# EAGLE board Motherboard (EAGLE 9.4.2)
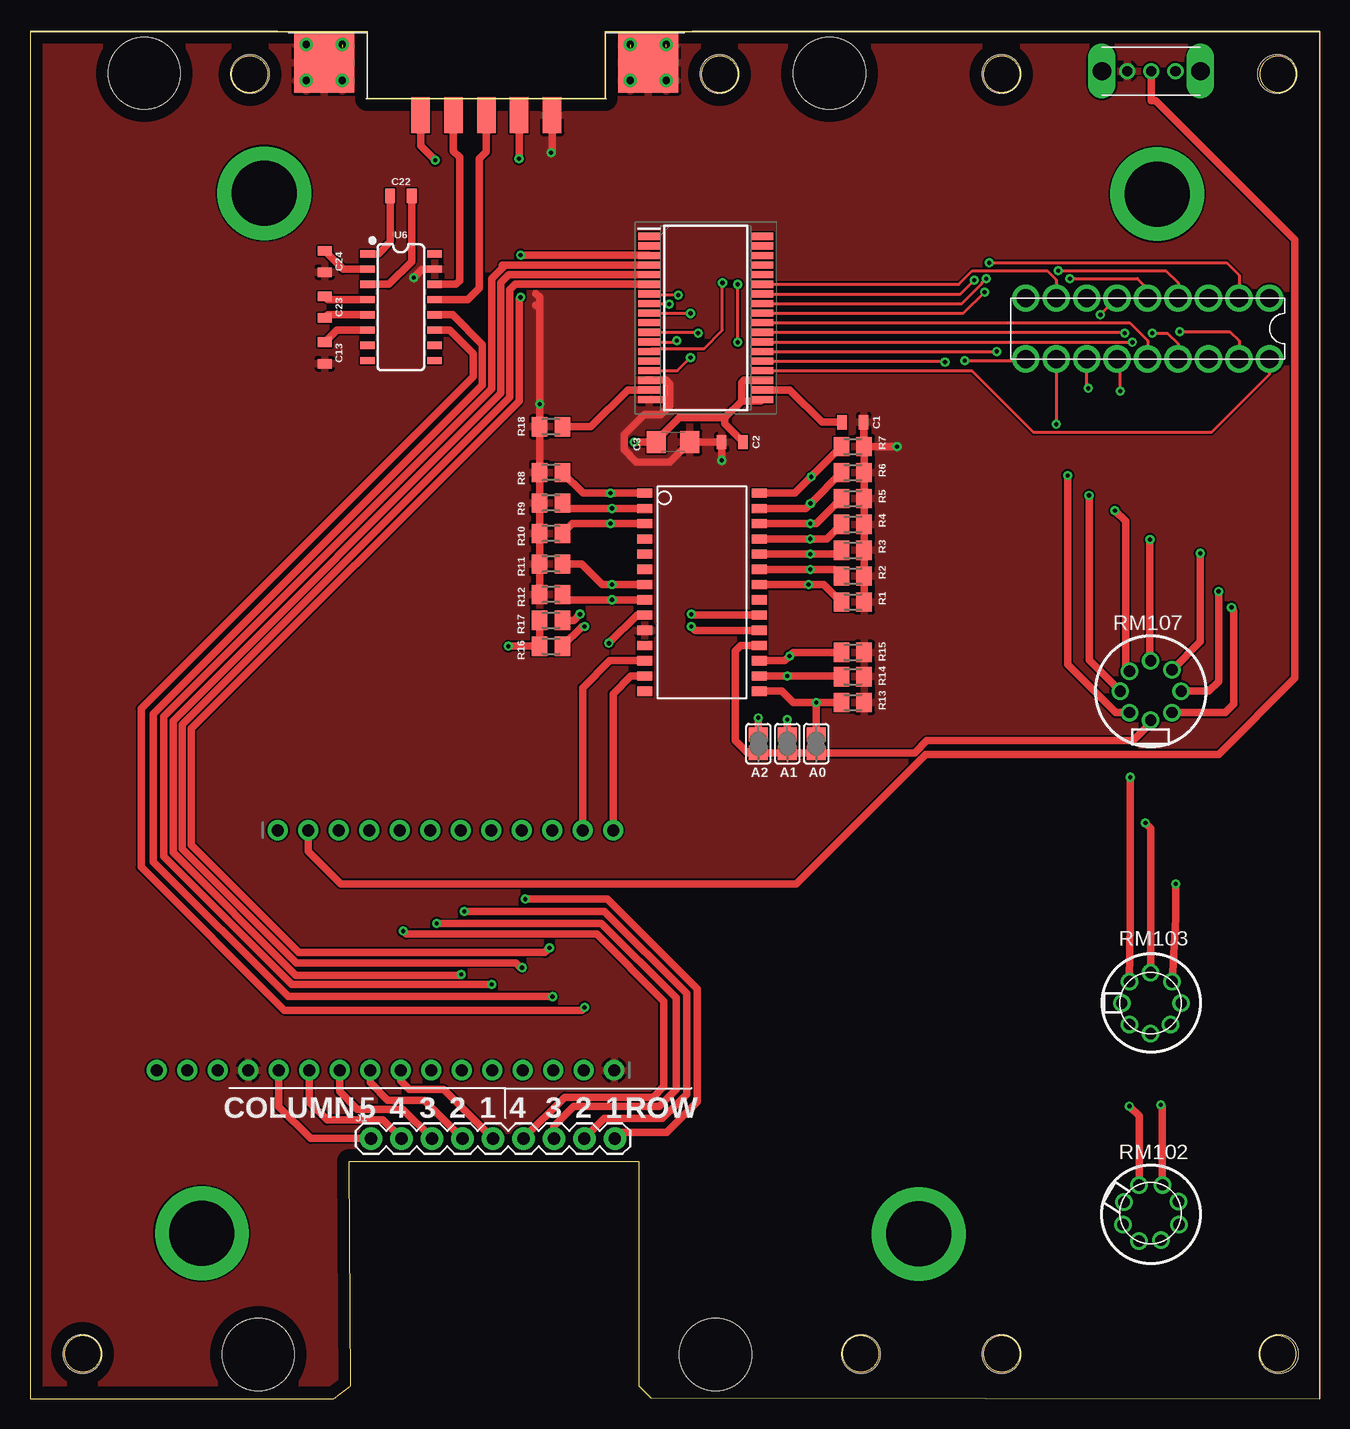
[diagram p0: board, top side]
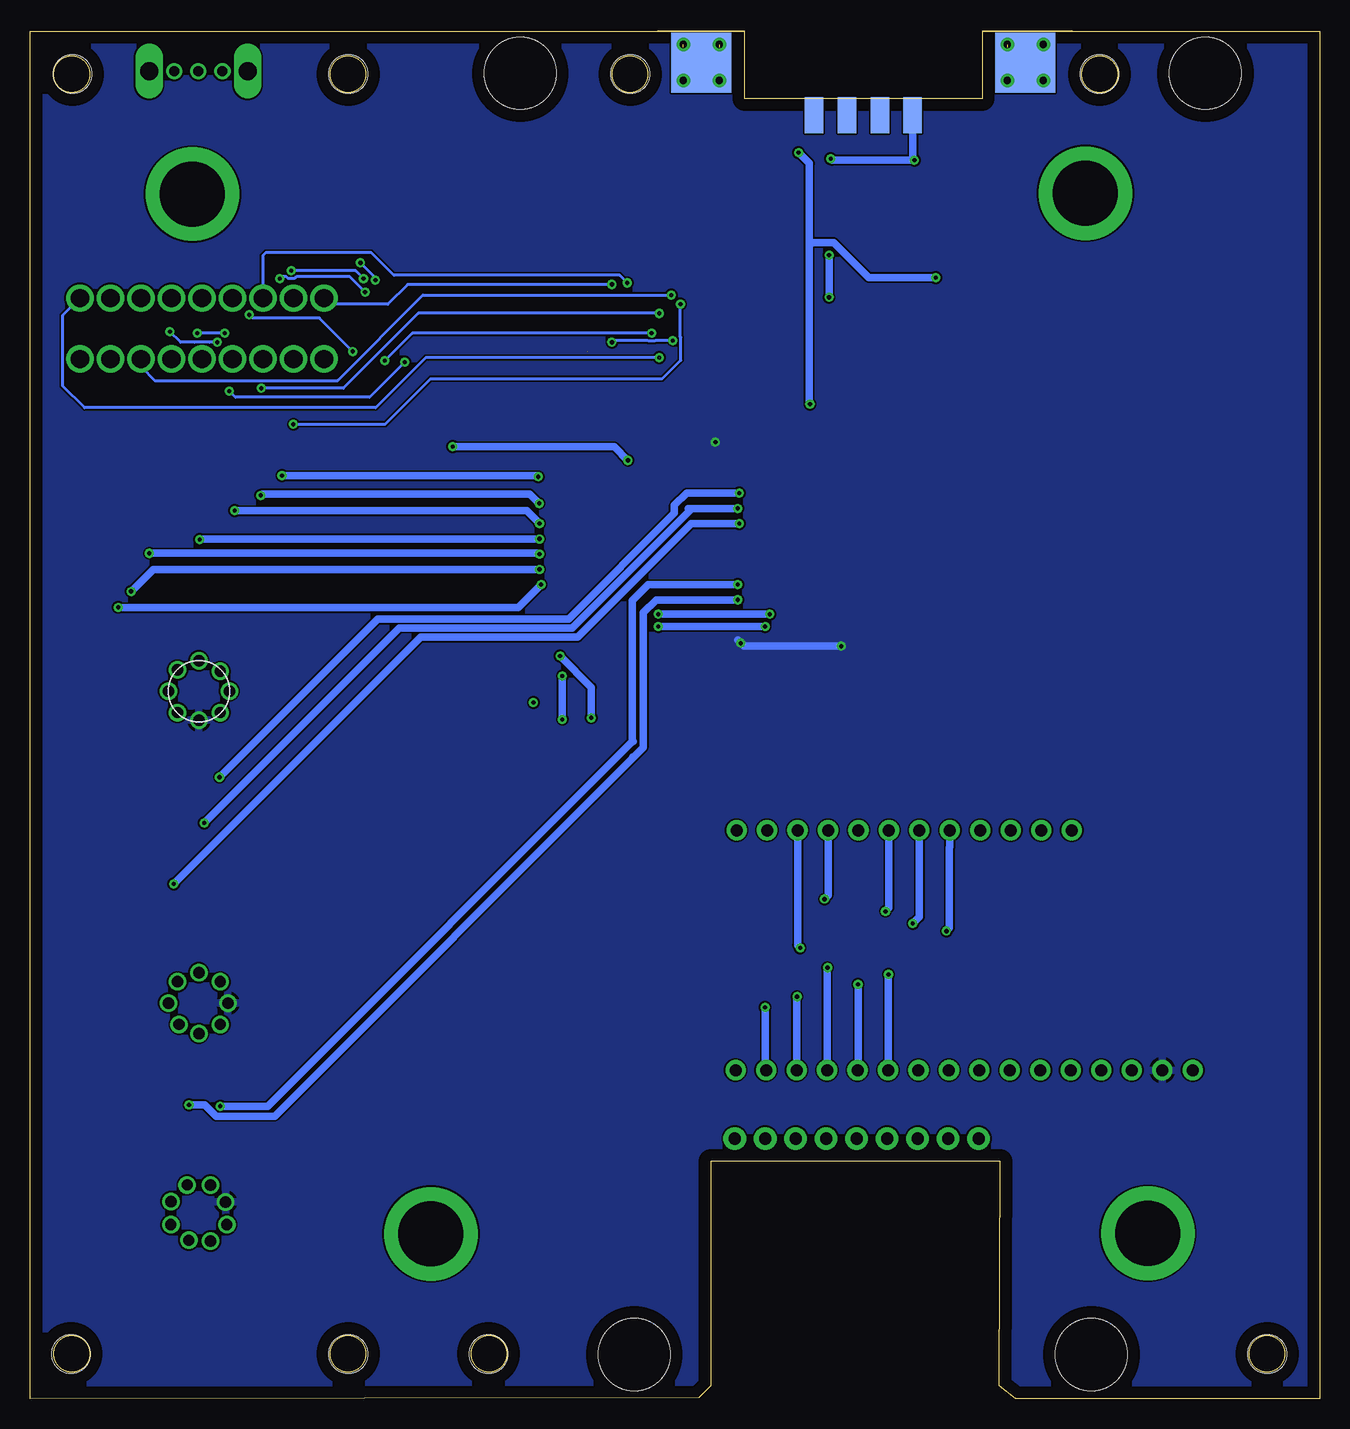
[diagram p1: board, bottom side, seen from below]

Size 107.47 x 114 mm. Coordinates in mm from the lower left corner, seen from the top.
Outline: 0,0 4.21,0 25.31,0 26.72,1.11 26.62,19.81 50.62,19.81 50.72,19.81 50.72,1.11 51.72,0.11 107.47,0 107.47,114 55.17,114 47.93,114 47.93,108.41 28.12,108.41 28.12,114 20.62,114 0,114 0,0
Outline: circle at 4.39,3.76 radius 1.5
Outline: circle at 69.22,3.76 radius 1.5
Outline: circle at 80.97,110.44 radius 1.5
Outline: circle at 104,110.44 radius 1.5
Outline: circle at 80.97,3.76 radius 1.5
Outline: circle at 104,3.76 radius 1.5
Outline: circle at 18.32,110.44 radius 1.5
Outline: circle at 57.47,110.44 radius 1.5
Copper layers (1*16): Top 0.035mm / dielectric 1.5mm / Bottom 0.035mm
Design rules "default": minimum track width 6mil, minimum drill 0.35mm, track to track 6mil, track to pad 6mil, pad to pad 6mil, via to via 6mil, smd to smd 6mil, copper to edge 40mil, drill to drill 6mil, minimum pad ring 10mil, minimum via ring 8mil, stop-mask expansion 4mil, vias tented up to drill 0mil, thermal gap 10mil
Holes 3.2 mm at 18.34,110.44 57.45,110.44 80.95,110.44 103.94,110.44 104.06,3.76 80.95,3.76 69.26,3.76 4.37,3.76
Holes 6 mm at 9.52,110.51 66.62,110.51 19.02,3.71 57.12,3.71
Milling: 8 lines

## Footprints (pad centres in the part's own frame; a part is rotated, then mirrored left to right if it is on the bottom)
SJ = smd 1.168 x 1.6: 1 -0.762,0; 2 0.762,0
0805 = smd 0.8 x 1.2: 1 -0.9,0; 2 0.9,0
C1206 = smd 1.6 x 1.8: 1 -1.4,0; 2 1.4,0
DE09S065TLF = drill 0.6: G1 -15,4.5; G2 -12,4.5; G3 -15,1.5; G4 -12,1.5; G5 12,4.5; G6 15,4.5; G7 12,1.5; G8 15,1.5 | smd 5 x 5 bottom: G9 13.5,3; G10 -13.5,3 | smd 5 x 5: G11 -13.5,3; G12 13.5,3 | smd 1.54 x 3: P1 5.48,-1.37; P2 2.74,-1.37; P3 0,-1.37; P4 -2.74,-1.37; P5 -5.48,-1.37 | smd 1.54 x 3 bottom: P6 4.11,-1.37; P7 1.37,-1.37; P8 -1.37,-1.37; P9 -4.11,-1.37
SOP80P1030X264-36N = smd 1.8 x 0.6: 1 -4.725,6.8; 2 -4.725,6; 3 -4.725,5.2; 4 -4.725,4.4; 5 -4.725,3.6; 6 -4.725,2.8; 7 -4.725,2; 8 -4.725,1.2; 9 -4.725,0.4; 10 -4.725,-0.4; 11 -4.725,-1.2; 12 -4.725,-2; 13 -4.725,-2.8; 14 -4.725,-3.6; 15 -4.725,-4.4; 16 -4.725,-5.2; 17 -4.725,-6; 18 -4.725,-6.8; 19 4.725,-6.8; 20 4.725,-6; 21 4.725,-5.2; 22 4.725,-4.4; 23 4.725,-3.6; 24 4.725,-2.8; 25 4.725,-2; 26 4.725,-1.2; 27 4.725,-0.4; 28 4.725,0.4; 29 4.725,1.2; 30 4.725,2; 31 4.725,2.8; 32 4.725,3.6; 33 4.725,4.4; 34 4.725,5.2; 35 4.725,6; 36 4.725,6.8
SO28W = smd 0.762 x 1.27: 1 -7.62,-4.78; 2 -6.35,-4.78; 3 -5.08,-4.78; 4 -3.81,-4.78; 5 -2.54,-4.78; 6 -1.27,-4.78; 7 0,-4.78; 8 1.27,-4.78; 9 2.54,-4.78; 10 3.81,-4.78; 11 5.08,-4.78; 12 6.35,-4.78; 13 7.62,-4.78; 14 8.89,-4.78; 15 8.89,4.78; 16 7.62,4.78; 17 6.35,4.78; 18 5.08,4.78; 19 3.81,4.78; 20 2.54,4.78; 21 1.27,4.78; 22 0,4.78; 23 -1.27,4.78; 24 -2.54,4.78; 25 -3.81,4.78; 26 -5.08,4.78; 27 -6.35,4.78; 28 -7.62,4.78
1X09 = drill 1.016 pad 1.88: 1 0,0; 2 2.54,0; 3 5.08,0; 4 7.62,0; 5 10.16,0; 6 12.7,0; 7 15.24,0; 8 17.78,0; 9 20.32,0
1X16_ROUND = drill 1 pad 1.676: 1 -19.05,0; 2 -16.51,0; 3 -13.97,0; 4 -11.43,0; 5 -8.89,0; 6 -6.35,0; 7 -3.81,0; 8 -1.27,0; 9 1.27,0; 10 3.81,0; 11 6.35,0; 12 8.89,0; 13 11.43,0; 14 13.97,0; 15 16.51,0; 16 19.05,0
1X12_ROUND = drill 1 pad 1.676: 1 -13.97,0; 2 -11.43,0; 3 -8.89,0; 4 -6.35,0; 5 -3.81,0; 6 -1.27,0; 7 1.27,0; 8 3.81,0; 9 6.35,0; 10 8.89,0; 11 11.43,0; 12 13.97,0
M0805 = smd 1.3 x 1.6: 1 -0.95,0; 2 0.95,0
SO16 = smd 0.6 x 1.2: 1 -4.445,-2.8; 2 -3.175,-2.8; 3 -1.905,-2.8; 4 -0.635,-2.8; 5 0.635,-2.8; 6 1.905,-2.8; 7 3.175,-2.8; 8 4.445,-2.8; 9 4.445,2.8; 10 3.175,2.8; 11 1.905,2.8; 12 0.635,2.8; 13 -0.635,2.8; 14 -1.905,2.8; 15 -3.175,2.8; 16 -4.445,2.8
DIP-18 = drill 1.524: 1 7.62,2.54; 2 5.08,2.54; 3 2.54,2.54; 4 0,2.54; 5 -2.54,2.54; 6 -5.08,2.54; 7 -7.62,2.54; 8 -10.16,2.54; 9 -12.7,2.54; 10 -12.7,-2.54; 11 -10.16,-2.54; 12 -7.62,-2.54; 13 -5.08,-2.54; 14 -2.54,-2.54; 15 0,-2.54; 16 2.54,-2.54; 17 5.08,-2.54; 18 7.62,-2.54
RM107772BCB = drill 0.95: 1 1.778,1.778; 2 2.54,0; 3 1.778,-1.778; 4 0,-2.54; 5 -1.778,-1.651; 6 -2.54,0; 7 -1.778,1.778; C 0,2.413
OS102011MA1QN1 = drill 1.524 pad 2 long: CASE1 0,0; CASE2 8.204,0 | drill 0.85 pad 1.27: P$1 2.108,0; P$2 4.115,0; P$3 6.121,0
KEYSTONESTANDOFF = drill 5.41 pad 7.8: P$1 0,0

## Placement (x,y rotation side)
A0  [SJ]  65.52,54.62 270 top
A1  [SJ]  63.1,54.62 270 top
A2  [SJ]  60.69,54.62 270 top
C1  22pf  [0805]  68.57,81.42 0 top
C2  100nF  [0805]  58.53,79.77 0 top
C3  47uF  [C1206]  53.58,79.77 180 top
C13  1.0uF  [0805]  24.56,87.2 270 top
C22  0.1uF  [0805]  30.91,100.28 0 top
C23  0.1uF  [0805]  24.56,91.01 270 top
C24  0.1uF  [0805]  24.56,94.82 270 top
DE9FEMALE  EDGEMOUNTDE9  [DE09S065TLF]  38.02,108.41 0 top
IC1  MAX6954AAX+  [SOP80P1030X264-36N]  56.31,90.12 0 top
IC2  MCP23017SO  [SO28W]  56,67.89 270 top
J1  [1X09]  28.42,21.71 0 top
JP1  [1X16_ROUND]  29.62,27.41 180 top
JP3  [1X12_ROUND]  34.62,47.41 0 top
R1  10k  [M0805]  68.57,66.44 180 top
R2  10k  [M0805]  68.57,68.59 180 top
R3  10k  [M0805]  68.57,70.75 180 top
R4  10k  [M0805]  68.57,72.91 180 top
R5  10k  [M0805]  68.57,75.07 180 top
R6  10k  [M0805]  68.57,77.23 180 top
R7  10k  [M0805]  68.57,79.39 180 top
R8  10k  [M0805]  43.42,77.23 0 top
R9  10k  [M0805]  43.42,74.69 0 top
R10  10k  [M0805]  43.42,72.15 0 top
R11  10k  [M0805]  43.42,69.61 0 top
R12  10k  [M0805]  43.42,67.07 0 top
R13  10k  [M0805]  68.57,58.05 180 top
R14  10k  [M0805]  68.57,60.21 180 top
R15  10k  [M0805]  68.57,62.24 180 top
R16  10k  [M0805]  43.42,62.75 180 top
R17  10k  [M0805]  43.42,64.91 180 top
R18  56k  [M0805]  43.42,81.04 0 top
U6  MAX3232  [SO16]  30.91,91.01 270 top
U$1  HDSP-A27C  [DIP-18]  95.68,89.23 0 top
U$2  RM107772BCB  [RM107772BCB]  93.39,59 180 bottom
U$3  RM107772BCB  [RM107772BCB]  93.39,33 90 top
U$5  OS102011MA1QN1  [OS102011MA1QN1]  89.33,110.69 0 top
U$6  RM107772BCB  [RM107772BCB]  93.39,15.5 67.5 top
U$7  KEYSTONESTANDOFF  [KEYSTONESTANDOFF]  14.32,13.81 0 top
U$8  KEYSTONESTANDOFF  [KEYSTONESTANDOFF]  19.52,100.51 0 top
U$9  KEYSTONESTANDOFF  [KEYSTONESTANDOFF]  74.06,13.76 0 top
U$10  KEYSTONESTANDOFF  [KEYSTONESTANDOFF]  93.94,100.44 0 top

## Library data of the parts
A0 A1 A2 = jumper
C1 C2 = SparkFun-Capacitors; PROD_ID: CAP-11625
C3 IC2 = adafruit
C13 C22-C24 = SparkFun-Capacitors; PROD_ID: CAP-08064
DE9FEMALE = Serial
IC1 = SamacSys_Parts; DESCRIPTION: MAX6954AAX+, LED Display Driver, 16-Digits 128-Segments, 2.7 5.5 V, 36-Pin SSOP; HEIGHT: 2.64mm; MANUFACTURER_NAME: Maxim Integrated; MANUFACTURER_PART_NUMBER: MAX6954AAX+; MOUSER_PART_NUMBER: 700-MAX6954AAX; MOUSER_PRICE-STOCK: https://www.mouser.com/Search/Refine.aspx?Keyword=700-MAX6954AAX
J1 = SparkFun-Connectors
JP1 JP3 = microbuilder
R1-R18 = resistor
U6 = SparkFun-IC-Comms; PROD_ID: IC-08171
U$1-U$3 U$6-U$10 = Segment displays
U$5 = FPC

## Nets
3V3: U6.16
!RESET: JP1.16
+3V3: A0.2 A1.2 A2.2 C2.2 C3.2 IC1.19 IC1.21 IC2.9 IC2.18 JP1.15 R16.2 R17.2 U$2.C U$3.C U$6.C
/CS: IC1.3 JP3.10
A5: JP1.7
AREF: JP1.14
D9: JP3.8
D13: JP3.4
EN: JP3.2 U$5.P$2
GND: C1.2 C2.1 C3.1 C13.2 C24.2 DE9FEMALE.G1 DE9FEMALE.G2 DE9FEMALE.G3 DE9FEMALE.G4 DE9FEMALE.G5 DE9FEMALE.G6 DE9FEMALE.G7 DE9FEMALE.G8 DE9FEMALE.G9 DE9FEMALE.G10 DE9FEMALE.G11 DE9FEMALE.G12 DE9FEMALE.P1 IC1.16 IC1.18 IC2.10 JP1.1 JP1.13 R1.1 R2.1 R3.1 R4.1 R5.1 R6.1 R7.1 R8.1 R9.1 R10.1 R11.1 R12.1 R13.1 R14.1 R15.1 R18.1 U6.15 U$5.P$1
KC1: J1.5 JP1.8
KC2: J1.4 JP1.9
KC3: J1.3 JP1.10
KC4: J1.2 JP1.11
KC5: J1.1 JP1.12
KR1: J1.9 JP3.9
KR2: J1.8 JP3.7
KR3: J1.7 JP3.6
KR4: J1.6 JP3.5
MISO: IC1.6 JP1.4
MOSI: IC1.4 JP1.5
N$1: IC1.7 U$1.16
N$2: IC1.9 U$1.12
N$3: IC1.11 U$1.10
N$4: IC1.12 U$1.9
N$5: IC1.13 U$1.7
N$6: IC1.15 U$1.1
N$7: IC1.22 U$1.18
N$8: IC1.23 U$1.13
N$9: IC1.24 U$1.6
N$10: IC1.25 U$1.17
N$11: IC1.26 U$1.15
N$12: IC1.27 U$1.14
N$13: IC1.28 U$1.5
N$14: IC1.29 U$1.4
N$15: IC1.30 U$1.2
N$16: IC1.31 U$1.8
N$17: IC1.8 U$1.11
N$18: C22.2 U6.3
N$19: C22.1 U6.1
N$20: C23.1 U6.4
N$21: C23.2 U6.5
N$22: C24.1 U6.2
N$23: C13.1 U6.6
N$24: DE9FEMALE.P2 DE9FEMALE.P5 DE9FEMALE.P9
N$25: A0.1 IC2.15 R13.2
N$26: A1.1 IC2.16 R14.2
N$27: A2.1 IC2.17 R15.2
N$28: IC2.19 R16.1
N$29: IC2.20 R17.1
N$30: C1.1 IC1.20
N$31: IC1.17 R18.2
RM102-1: IC2.7 R11.2 U$6.1
RM102-2: IC2.8 R12.2 U$6.2
RM103-1: IC2.1 R8.2 U$3.1
RM103-2: IC2.2 R9.2 U$3.2
RM103-3: IC2.3 R10.2 U$3.3
RM107-1: IC2.22 R1.2 U$2.1
RM107-2: IC2.23 R2.2 U$2.2
RM107-3: IC2.24 R3.2 U$2.3
RM107-4: IC2.25 R4.2 U$2.4
RM107-5: IC2.26 R5.2 U$2.5
RM107-6: IC2.27 R6.2 U$2.6
RM107-7: IC2.28 R7.2 U$2.7
RXD: DE9FEMALE.P3 U6.13
SCK: IC1.5 JP1.6
SCL: IC2.12 JP3.11
SDA: IC2.13 JP3.12
TXD: DE9FEMALE.P4 U6.14
UART_RX: JP1.3 U6.12
UART_TX: JP1.2 U6.11
VBAT: JP3.1
VBUS: JP3.3

## Tracks (layer width: path | path; a pad name or v marks a point on that pad's centre or on a via)
+3V3  (via drill 0.35)
  Top 0.61: R17.2 R16.2 v39.86,62.75 | C3.2 52.18,79.89 54.09,81.8 57.9,81.8 | 57.9,81.8 59.29,83.2 | 59.29,83.2 59.29,84.72 59.49,84.92 IC1.21 | IC1.19 60.91,83.2 59.29,83.2 | C2.2 57.9,81.3 57.9,81.8 | U$2.C 93.39,56.34 91.93,54.88 74.73,54.88 73.71,53.86 A0.2 A1.2 A2.2 59.8,53.86 58.79,54.88 58.79,62.37 59.23,62.81 IC2.18 | IC2.9 50.59,65.35 v48.25,63.01 | C3.2 v50.35,79.77 | C3.2 50.28,79.77 C3.2
  Bottom 0.61: 48.5,63.26 v48.25,63.01 47.99,62.75 v39.86,62.75
  pour Bottom: 0.24,114.06 28.18,114.06 28.18,108.34 47.86,108.34 47.86,113.81 107.56,113.81 107.56,0.01 51.93,0.01 50.79,1.16 50.79,19.57 50.66,19.7 26.66,19.7 26.66,1.41 25.26,0.01 0.11,0.01 0.11,113.93
/CS  (via drill 0.35)
  Top 0.61: v43.29,37.61 42.91,37.22 22.4,37.22 13.45,46.17 13.45,55.89 40.75,83.2 40.75,91.71 v40.88,91.83 | v40.88,95.35 51.55,95.35 IC1.3
  Bottom 0.61: JP3.10 43.51,37.82 v43.29,37.61 | v40.88,91.83 v40.88,95.35
EN
  Top 0.61: JP3.2 23.19,45.64 25.89,42.94 63.87,42.94 74.66,53.73 99.05,53.73 105.4,60.08 105.4,96.63 93.8,108.23 93.45,108.23 U$5.P$2
GND  (via drill 0.35)  (3 unrouted)
  Top 0.61: R7.1 R6.1 R5.1 R4.1 R3.1 R2.1 R1.1 | R12.1 R11.1 R10.1 R9.1 R8.1 R18.1 | R7.1 69.47,79.44 C1.2 | 53.33,83.33 53.33,82.82 52.56,82.06 51.17,82.06 49.52,80.41 49.52,79.13 50.53,78.12 53.33,78.12 C3.1 C2.1 57.64,79.76 v57.64,78.25 | 53.33,83.33 53.33,84.6 53,84.92 IC1.16 | IC1.18 53.32,83.32 53.33,83.33 | R18.1 v42.47,82.94 | v42.47,82.94 42.47,90.88 42.15,91.2 | R18.1 v42.47,82.94 | v42.47,82.94 42.47,91.84 42.15,92.16 | U6.15 32.69,94.19 v31.99,93.49 | DE9FEMALE.P1 43.5,103.98 v43.42,103.9 | R7.1 v72.25,79.39 | DE9FEMALE.G1 24.39,111.54 | 26.02,112.67 25.79,112.67 25.14,112.02 25.14,111.52 25.03,111.41 DE9FEMALE.G10 | DE9FEMALE.G10 24.52,110.4 24.03,109.91 DE9FEMALE.G3 | DE9FEMALE.G10 24.48,111.41 24.37,111.52 24.39,111.54 | DE9FEMALE.G10 24.39,111.54 | DE9FEMALE.G10 DE9FEMALE.G4 | DE9FEMALE.G9 51.15,111.41 49.89,112.67 49.77,112.67 | DE9FEMALE.G9 52.79,112.67 53.02,112.67 | DE9FEMALE.G9 52.42,111.41 53.58,110.25 53.24,109.91 DE9FEMALE.G8 | DE9FEMALE.G9 DE9FEMALE.G7 | DE9FEMALE.G9 51.52,110.73 51.04,110.25 51.04,110.93 DE9FEMALE.G9
  Bottom 0.61: v31.99,93.49 37.58,93.49 40.5,96.41 42.28,96.41 42.53,96.15 | v42.47,82.94 42.53,83.01 42.53,96.15 | 42.53,96.15 42.53,103.01 v43.42,103.9 | v72.25,79.39 58.79,79.39 v57.64,78.25 | 23.02,112.67 23.26,112.67 DE9FEMALE.G10 | DE9FEMALE.G3 23.02,110.17 23.1,110.25 23.36,110.25 DE9FEMALE.G10 | DE9FEMALE.G4 25.98,109.91 25,110.88 24.37,110.25 24.52,110.4 DE9FEMALE.G10 | 26.02,112.67 25.79,112.67 DE9FEMALE.G10 | 51.04,112.67 50.02,112.67 | 50.02,112.67 49.77,112.67 50.02,112.67 | 50.02,112.67 51.04,112.67 | 53.02,112.67 51.04,112.67 | DE9FEMALE.G9 DE9FEMALE.G7 | DE9FEMALE.G9 DE9FEMALE.G8 | DE9FEMALE.G9 51.52,112.19 51.04,112.67 | DE9FEMALE.G9 51.29,111.41 50.02,112.67
  pour Top: 0.24,114.06 28.18,114.06 28.18,107.71 47.99,107.71 47.99,113.81 107.56,113.81 107.56,0.01 51.93,0.01 50.79,1.16 50.79,19.7 26.66,19.7 26.66,1.16 25.51,0.01 24.88,0.01 -0.01,0.01 -0.01,113.93 0.11,114.06
KC1
  Top 0.61: J1.5 34.49,25.79 31.61,25.79 30.89,26.51 JP1.8
KC2
  Top 0.61: J1.4 32.84,24.91 29.83,24.91 28.35,26.39 JP1.9
KC3
  Top 0.61: J1.3 31.07,24.14 27.29,24.14 25.81,25.63 JP1.10
KC4
  Top 0.61: J1.2 29.42,23.25 24.75,23.25 23.27,24.74 JP1.11
KC5
  Top 0.61: J1.1 23.38,21.71 20.73,24.36 JP1.12
KR1  (via drill 0.35)
  Top 0.61: J1.9 49.27,22.24 53.07,22.24 55.61,24.78 55.61,34.18 48.12,41.67 v41.26,41.67
  Bottom 0.61: JP3.9 40.97,41.96 v41.26,41.67
KR2  (via drill 0.35)
  Top 0.61: J1.8 47.87,23.38 49.01,23.38 52.69,23.38 53.83,24.52 54.72,25.41 54.72,27.45 54.72,33.8 47.86,40.65 v36.18,40.65
  Bottom 0.61: JP3.7 35.89,40.94 v36.18,40.65
KR3  (via drill 0.35)
  Top 0.61: v33.89,39.64 47.61,39.64 53.83,33.42 53.83,25.79 52.44,24.4 45.32,24.4 43.66,22.73 J1.7
  Bottom 0.61: JP3.6 33.35,40.18 v33.89,39.64
KR4  (via drill 0.35)
  Top 0.61: J1.6 44.57,25.16 51.93,25.16 52.82,26.05 52.82,33.16 47.23,38.75 31.36,38.75 v31.1,39
  Bottom 0.61: v31.1,39 30.85,39.26 30.85,45.99 30.81,46.03 JP3.5
MISO  (via drill 0.35)
  Top 0.61: v41.01,35.95 40.88,35.95 40.5,36.34 22.21,36.34 12.69,45.86 12.69,56.21 39.99,83.52 39.99,92.47 40.44,92.92 IC1.6
  Bottom 0.61: JP1.4 41.05,35.91 v41.01,35.95
MOSI  (via drill 0.35)
  Top 0.61: IC1.4 39.61,94.52 | 39.61,94.52 39.37,94.52 | 39.61,94.52 38.47,93.38 38.47,84.22 11.16,56.91 11.16,45.23 21.83,34.56 v38.47,34.56
  Bottom 0.61: v38.47,34.56 38.47,27.45 JP1.5
N$1  (via drill 0.35)  (1 unrouted)
  Top 0.254: v54.02,92.02 51.68,92.02 IC1.7
  Bottom 0.254: U$1.16 98.22,86.06 97.08,84.91 81.84,84.91 74.73,92.02 v54.02,92.02
N$2  (via drill 0.35)  (1 unrouted)
  Top 0.254: IC1.9 55.02,90.52 v55.04,90.5 | v88.19,84.25 88.06,84.38 U$1.12
  Bottom 0.254: v55.04,90.5 75.11,90.5 81.35,84.25 v88.19,84.25
N$3  (via drill 0.35)
  Top 0.254: IC1.11 55.6,88.92 v55.67,88.85 | v77.9,86.56 82.85,86.56 U$1.10
  Bottom 0.254: v55.67,88.85 75.61,88.85 v77.9,86.56
N$4  (via drill 0.35)
  Top 0.254: IC1.12 53.78,88.12 v53.9,88.24 | v58.98,88.09 v58.98,92.91
  Bottom 0.254: v58.98,88.09 58.83,88.24 55.99,88.24 55.95,88.19 55.4,88.19 55.36,88.24 v53.9,88.24 | v58.98,92.91 76,92.91 77.65,91.26 82.47,91.26 U$1.9
N$5  (via drill 0.35)
  Top 0.254: IC1.13 51.81,87.54 52.6,87.54 52.64,87.58 56.18,87.58 57.71,89.1 v57.71,93.04
  Bottom 0.254: v57.71,93.04 58.34,93.68 77.14,93.68 79.04,95.58 87.81,95.58 88.06,95.33 U$1.7
N$6  (via drill 0.35)  (1 unrouted)
  Top 0.254: IC1.15 53.94,85.72 v55.04,86.82
  Bottom 0.254: v55.04,86.82 74.47,86.82 78.66,82.63 102.92,82.63 104.72,84.43 104.72,90.35 U$1.1
N$7
  Top 0.254: IC1.22 78.49,85.72 83.62,80.59 98.47,80.59 103.3,85.42 U$1.18
N$8  (via drill 0.35)
  Top 0.254: IC1.23 76.17,86.52 v76.25,86.44 | v90.85,84.02 90.85,86.44 U$1.13
  Bottom 0.254: v76.25,86.44 79.17,83.52 90.35,83.52 v90.85,84.02
N$9  (via drill 0.35)  (1 unrouted)
  Top 0.254: IC1.24 v80.56,87.32 v80.57,87.33 | v89.2,90.38 v89.21,90.38 U$1.6
  Bottom 0.254: v80.57,87.33 83.36,90.12 88.95,90.12 v89.2,90.38
N$10  (via drill 0.35)
  Top 0.254: IC1.25 91.84,88.12 v91.87,88.09 | v95.81,88.98 100,88.98 100.76,88.22 U$1.17
  Bottom 0.254: v95.81,88.98 94.92,88.09 93.76,88.09 93.73,88.11 92.55,88.11 92.53,88.09 v91.87,88.09
N$11  (via drill 0.35)
  Top 0.254: IC1.26 91.17,88.92 v91.23,88.85 | v93.52,88.85 94.79,88.85 95.68,87.96 U$1.15
  Bottom 0.254: v91.23,88.85 v93.52,88.85
N$12
  Top 0.254: IC1.27 91.64,89.72 93.14,88.22 U$1.14
N$13  (via drill 0.35)
  Top 0.254: IC1.28 77.79,90.52 v79.55,92.28 | v86.66,93.4 92.27,93.4 93.14,92.53 U$1.5
  Bottom 0.254: v79.55,92.28 80.82,93.55 85.27,93.55 85.42,93.4 85.96,93.4 86.11,93.55 86.51,93.55 v86.66,93.4
N$14  (via drill 0.35)
  Top 0.254: v79.68,93.4 79.34,93.06 79.34,93 77.66,91.32 IC1.29 | v85.69,94.06 94.66,94.06 95.68,93.04 U$1.4
  Bottom 0.254: v79.68,93.4 80.34,94.06 v85.69,94.06
N$15  (via drill 0.35)
  Top 0.254: IC1.30 77.53,92.12 v78.68,93.27 | v79.93,94.72 99.72,94.72 100.76,93.68 U$1.2
  Bottom 0.254: v78.68,93.27 78.68,93.47 v79.93,94.72
N$16
  Top 0.254: IC1.31 77.4,92.92 78.54,94.06 84.76,94.06 85.52,93.3 U$1.8
N$17  (via drill 0.35)
  Top 0.254: U$1.11 v85.52,81.25 | v85.52,81.25 85.52,81.23 v85.52,81.25 | v53.26,91.26 51.64,91.26 IC1.8
  Bottom 0.254: v85.52,81.25 77.88,81.25 74.09,85.04 54.79,85.04 53.24,86.59 53.24,88.51 53.26,88.53 v53.26,91.26
N$18
  Top 0.61: C22.2 31.81,94.83 29.89,92.91 U6.3
N$19
  Top 0.61: C22.1 30.01,96.46 29.01,95.45 U6.1
N$20
  Top 0.61: U6.4 24.82,91.64 C23.1
N$21
  Top 0.61: U6.5 24.82,90.38 C23.2
N$22
  Top 0.61: U6.2 26.1,94.19 C24.1
N$23
  Top 0.61: U6.6 25.57,89.1 C13.1
N$24  (via drill 0.35)
  Top 0.61: DE9FEMALE.P5 32.54,104.49 v33.77,103.27 | v40.75,103.39 40.75,107.03 DE9FEMALE.P2
  Bottom 0.61: v40.75,103.39 40.63,103.27 v33.77,103.27 33.91,103.41 DE9FEMALE.P9
N$25  (via drill 0.35)
  Top 0.61: IC2.15 62.67,59 63.61,58.05 v65.52,58.05 | v65.52,58.05 R13.2 | A0.1 v65.52,58.05
N$26  (via drill 0.35)
  Top 0.61: R14.2 67.56,60.27 v63.1,60.27 IC2.16 | A1.1 v63.1,56.66
  Bottom 0.61: v63.1,56.66 v63.1,60.27
N$27  (via drill 0.35)
  Top 0.61: IC2.17 62.91,61.54 v63.29,61.93 63.61,62.24 R15.2 | A2.1 v60.69,56.78
  Bottom 0.61: v60.69,56.78 60.69,59.32 v63.29,61.93
N$28  (via drill 0.35)
  Top 0.61: R16.1 46.02,64.4 v46.21,64.4 | v55.1,64.4 55.43,64.08 IC2.19
  Bottom 0.61: v46.21,64.4 v55.1,64.4
N$29  (via drill 0.35)
  Top 0.61: IC2.20 55.17,65.35 v55.1,65.42 | v45.83,65.42 45.32,64.91 R17.1
  Bottom 0.61: v55.1,65.42 v45.83,65.42
N$30
  Top 0.61: IC1.20 63.33,84.12 66.03,81.42 C1.1
N$31
  Top 0.61: R18.2 46.72,81.04 49.8,84.12 IC1.17
RM102-1  (via drill 0.35)
  Top 0.61: R11.2 45.96,69.61 47.68,67.89 v48.5,67.89 IC2.7 | U$6.1 92.43,23.6 v91.62,24.41
  Bottom 0.61: v48.5,67.89 55.93,67.89 57.26,66.56 57.26,54.81 | 57.26,54.81 57.22,54.81 | v91.62,24.41 87.66,24.41 57.26,54.81
RM102-2  (via drill 0.35)
  Top 0.61: R12.2 44.82,66.62 v48.5,66.62 IC2.8 | v94.22,24.51 94.37,24.36 U$6.2
  Bottom 0.61: v48.5,66.62 55.3,66.62 56.37,65.55 56.37,54.29 57.14,53.53 | 57.14,53.53 57.16,53.5 | 57.14,53.53 57.24,53.53 | v94.22,24.51 92.9,24.51 91.97,23.57 87.09,23.57 57.14,53.53
RM103-1  (via drill 0.35)
  Top 0.61: IC2.1 v48.37,75.51 46.09,75.51 R8.2 | v91.68,51.83 91.68,39.85 U$3.1
  Bottom 0.61: v48.37,75.51 52.76,75.51 53.77,74.5 53.77,73.86 62.59,65.04 78.47,65.04 84.06,59.45 | 83.55,59.96 84.06,59.45 | 84.06,59.45 v91.68,51.83
RM103-2  (via drill 0.35)
  Top 0.61: R9.2 44.82,74.24 v48.5,74.24 IC2.2 | v92.95,48.02 93.39,47.58 U$3.2
  Bottom 0.61: v48.5,74.24 52.31,74.24 | 52.31,74.24 52.63,74.24 | 52.31,74.24 62.27,64.28 76.69,64.28 v92.95,48.02
RM103-3  (via drill 0.35)
  Top 0.61: R10.2 45.19,72.97 v48.37,72.97 IC2.3 | v95.49,42.94 95.49,40.1 U$3.3
  Bottom 0.61: v48.37,72.97 52.38,72.97 61.84,63.51 74.92,63.51 v95.49,42.94
RM107-1  (via drill 0.35)
  Top 0.61: IC2.22 v64.88,67.89 66.16,67.89 R1.2 | U$2.1 99.62,57.23 100.32,57.93 100.32,65.67 100.06,65.93 v100.12,65.99
  Bottom 0.61: v100.12,65.99 66.78,65.99 v64.88,67.89
RM107-2  (via drill 0.35)
  Top 0.61: R2.2 67.05,69.16 v65.01,69.16 IC2.23 | v99.05,67.32 99.05,59.83 98.22,59 U$2.2
  Bottom 0.61: v65.01,69.16 97.21,69.16 v99.05,67.32
RM107-3  (via drill 0.35)
  Top 0.61: R3.2 67.29,70.43 v65.01,70.43 IC2.24 | U$2.3 97.52,63.13 v97.52,70.5
  Bottom 0.61: v97.52,70.5 65.08,70.5 v65.01,70.43
RM107-4  (via drill 0.35)
  Top 0.61: R4.2 66.4,71.7 v65.01,71.7 IC2.25 | v93.33,71.64 93.33,61.61 U$2.4
  Bottom 0.61: v65.01,71.7 93.27,71.7 v93.33,71.64
RM107-5  (via drill 0.35)
  Top 0.61: R5.2 65.52,72.97 v65.01,72.97 IC2.26 | U$2.5 91.3,60.97 91.3,73.17 v90.41,74.05
  Bottom 0.61: v90.41,74.05 66.09,74.05 v65.01,72.97
RM107-6  (via drill 0.35)
  Top 0.61: R6.2 v65.04,74.66 64.63,74.24 IC2.27 | v88.25,75.33 88.25,61.61 U$2.6
  Bottom 0.61: v65.04,74.66 65.84,75.45 88.12,75.45 v88.25,75.33
RM107-7  (via drill 0.35)
  Top 0.61: R7.2 v65.11,76.88 63.74,75.51 IC2.28 | U$2.7 90.47,57.23 86.47,61.23 v86.47,76.98
  Bottom 0.61: v86.47,76.98 65.2,76.98 v65.11,76.88
RXD
  Top 0.61: DE9FEMALE.P3 38.02,103.96 37.45,103.39 37.45,92.6 36.5,91.64 U6.13
SCK  (via drill 0.35)
  Top 0.61: IC1.5 41.41,93.72 41.39,93.74 39.91,93.74 39.23,93.06 39.23,83.83 11.92,56.53 11.92,45.54 22.15,35.32 35.85,35.32 v35.93,35.39
  Bottom 0.61: v35.93,35.39 35.97,35.35 JP1.6
SCL
  Top 0.61: IC2.12 48.3,61.54 46.05,59.29 JP3.11
SDA
  Top 0.61: JP3.12 48.59,58.78 50.08,60.27 IC2.13
TXD
  Top 0.61: U6.14 35.48,92.91 35.8,93.23 35.8,103.52 35.28,104.04 DE9FEMALE.P4
UART_RX  (via drill 0.35)
  Top 0.61: v43.55,33.54 21.51,33.54 10.27,44.78 10.27,57.1 37.7,84.53 37.7,87.9 35.23,90.38 U6.12
  Bottom 0.61: JP1.3 43.59,33.5 v43.55,33.54
UART_TX  (via drill 0.35)
  Top 0.61: U6.11 34.97,89.1 36.94,87.14 36.94,85.23 9.26,57.55 9.26,44.34 21.2,32.4 45.96,32.4 v46.21,32.65
  Bottom 0.61: v46.21,32.65 46.21,27.49 JP1.2

## Text on the board
tPlace: RM107 | RM103 | COLUMN | 5 | 4 | 3 | 2 | 1 | 4 | 3 | 2 | 1 | ROW | RM102